# Altium PCB Cathode side.PcbDoc
Units mm, origin at the board's own origin, x right, y up, seen from the top; angles counter-clockwise.
Board outline 181.64 x 80 mm, 2 copper layers (Top Layer, Bottom Layer); 6 components, 18 nets, 105 pads, 0 vias.
Unrouted connection lines stored in the file: 40.
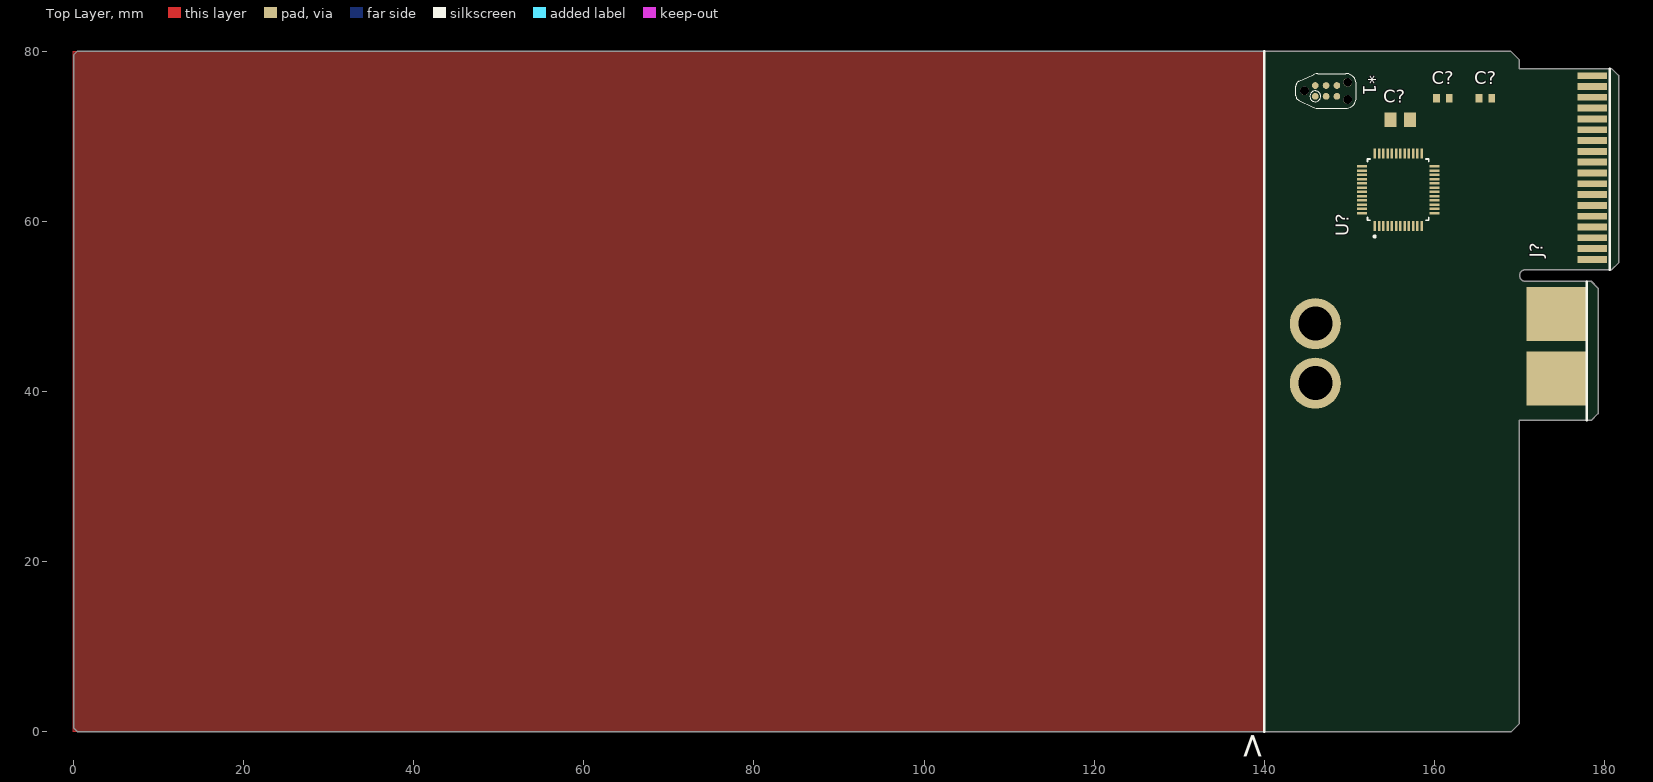
[diagram p0: Top Layer view]
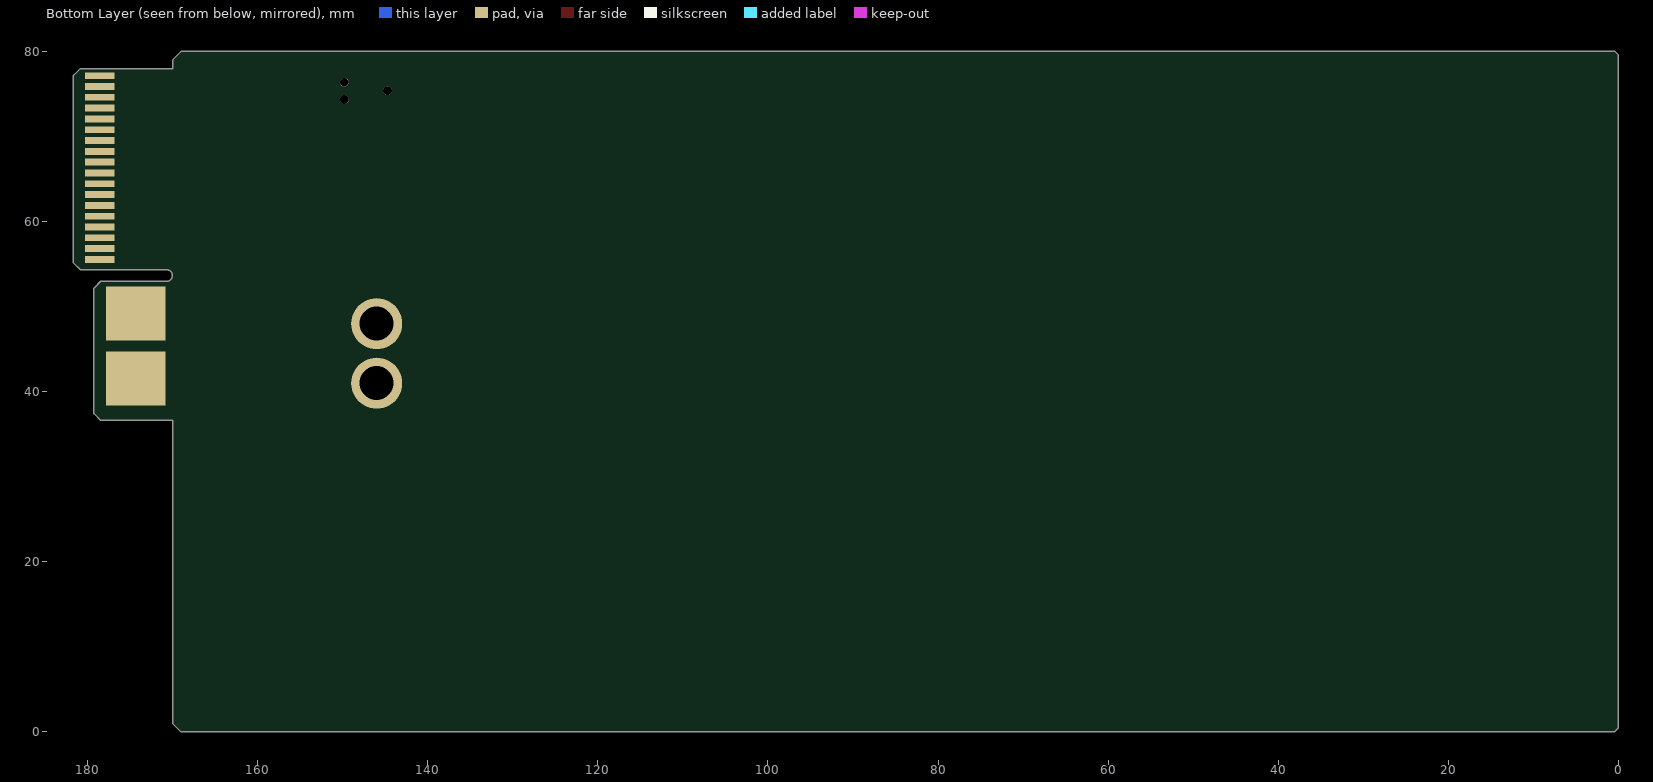
[diagram p1: Bottom Layer view, seen from below]

## Layer stack, top to bottom
Top Solder: solder mask 0.0102, Solder Resist, Dk 3.5
Top Layer: signal copper 0.0356
Dielectric 1: dielectric 0.32, FR-4, Dk 4.8
Bottom Layer: signal copper 0.0356
Bottom Solder: solder mask 0.0102, Solder Resist, Dk 3.5

## Board outline
0.006,0.494 0.5,0 169,0 170,1 170,36.62 178.44,36.62 179.25,37.43 179.25,52.17 178.44,52.98 170.7,52.98 cw(c170.7,53.66) 170.7,54.34 180.84,54.34 181.65,55.15 181.65,77.19 180.84,78 170,78 170,79 169,80 0.413,80 0.006,79.594

## Design rules (kind name [scope] priority, off if disabled: settings)
Clearance [All] p1: gap=0.254 ignorepadtopadclearanceinfootprint=FALSE
DiffPairsRouting [All] p1: maxlimit=0.254 minlimit=0.254 mostfreqgap=0.254 toplayer_minwidth=0.381 toplayer_maxwidth=0.381 toplayer_prefwidth=0.381 bottomlayer_minwidth=0.381 bottomlayer_maxwidth=0.381 bottomlayer_prefwidth=0.381 maxuncoupledlength=12.7
PolygonConnect [All] p1: connectstyle=Relief reliefconductorwidth=0.254 reliefentries=4 polygonreliefangle="90 Angle" airgapwidth=0.254
RoutingVias [All] p1: holewidth=0.711 width=1.27 viastyle="Through Hole" minholewidth=0.711 minwidth=1.27 maxholewidth=0.711 maxwidth=1.27
SolderMaskExpansion [All] p1: expansion=0.102 istentingtop=FALSE
Width [All] p1: maxlimit=0.254 minlimit=0.254 preferedwidth=0.254
29 further rules are at their usual default settings.

## Classes and differential pairs
component class "power management": J?
component class mcu: *1 C? U?
differential pair C_SENSE: +C_SENSE_P -C_SENSE_N

## Components (designator, comment, footprint, x,y, rotation, side; value= is the part's Value field where it differs from the comment)
*1 "TC2030" TC2030-IDC-NL 147.27,75.365 r0 top
C? "100N" CAP_0603 166,74.5 r0 top
C? "4U7" CAP_0805 156,72 r0 top
C? "100N" CAP_0603 161,74.5 r0 top
J? "2204061-2 CARD EDGE" "2204061-2 CARD EDGE-Footprint-1" 170,36.62 r90 top locked
U? "STM32G070CBT6" FP-LQFP48-5B-MFG 155.75,63.75 r90 top

## Footprints (in the part's own frame and the unit in brackets; to place one, negate y for a bottom-side part, rotate by r counter-clockwise, add the part's x,y. Pads: shape width x height; smd on the part's side, far side on the other; paste and mask are expansions set on the pad)
"2204061-2 CARD EDGE-Footprint-1" [mm]
  rect 6.35x7 smd far side: 1(4.925,-4.325) 2(12.55,-4.34)
  rect 6.35x7 smd: 3(4.925,-4.325) 4(12.545,-4.325)
  rect 0.8x3.5 smd: 5(18.94,-8.575) 6(20.21,-8.575) 7(21.48,-8.575) 8(22.75,-8.575) 9(24.02,-8.575) 10(25.29,-8.575) 11(26.56,-8.575) 12(27.83,-8.575) 13(29.1,-8.575) 14(30.37,-8.575) 15(31.64,-8.575) 16(32.91,-8.575) 17(34.18,-8.575) 18(35.45,-8.575) 19(36.72,-8.575) 20(37.99,-8.575) 21(39.26,-8.575) 22(40.53,-8.575)
  rect 0.8x3.5 smd far side: 5(18.94,-8.575) 6(20.21,-8.575) 7(21.48,-8.575) 8(22.75,-8.575) 9(24.02,-8.575) 10(25.29,-8.575) 11(26.56,-8.575) 12(27.83,-8.575) 13(29.1,-8.575) 14(30.37,-8.575) 15(31.64,-8.575) 16(32.91,-8.575) 17(34.18,-8.575) 18(35.45,-8.575) 19(36.72,-8.575) 20(37.99,-8.575) 21(39.26,-8.575) 22(40.53,-8.575)
  silkscreen extent 0,-10.6 41.35,-7.92
CAP_0603 [mm]
  rect 0.8x1 smd: 1(-0.75,0) 2(0.75,0)
  body extent -0.8,-0.4 0.8,0.4, height 0.51
CAP_0805 [mm]
  rect 1.4x1.7 smd: 1(-1.143,0) 2(1.143,0)
  body extent -1.15,-0.76 1.15,0.79, height 1.01
FP-LQFP48-5B-MFG [mm]
  rect 1.2x0.3 smd paste+0 mask+0: 1(-4.25,2.75) 2(-4.25,2.25) 3(-4.25,1.75) 4(-4.25,1.25) 5(-4.25,0.75) 6(-4.25,0.25) 7(-4.25,-0.25) 8(-4.25,-0.75) 9(-4.25,-1.25) 10(-4.25,-1.75) 11(-4.25,-2.25) 12(-4.25,-2.75) 25(4.25,-2.75) 26(4.25,-2.25) 27(4.25,-1.75) 28(4.25,-1.25) 29(4.25,-0.75) 30(4.25,-0.25) 31(4.25,0.25) 32(4.25,0.75) 33(4.25,1.25) 34(4.25,1.75) 35(4.25,2.25) 36(4.25,2.75)
  rect 0.3x1.2 smd paste+0 mask+0: 13(-2.75,-4.25) 14(-2.25,-4.25) 15(-1.75,-4.25) 16(-1.25,-4.25) 17(-0.75,-4.25) 18(-0.25,-4.25) 19(0.25,-4.25) 20(0.75,-4.25) 21(1.25,-4.25) 22(1.75,-4.25) 23(2.25,-4.25) 24(2.75,-4.25) 37(2.75,4.25) 38(2.25,4.25) 39(1.75,4.25) 40(1.25,4.25) 41(0.75,4.25) 42(0.25,4.25) 43(-0.25,4.25) 44(-0.75,4.25) 45(-1.25,4.25) 46(-1.75,4.25) 47(-2.25,4.25) 48(-2.75,4.25)
  silkscreen extent -5.62,-3.6 3.6,3.6, body extent -4.95,-4.95 4.95,4.95, height 0.25
TC2030-IDC-NL [mil]
  round 31 smd paste-39.37: 1(-50,-25) 2(-50,25) 3(0,-25) 4(0,25) 5(50,-25) 6(50,25)
  round 40 hole 40 unplated: ""(-100,0) ""(100,-40) ""(100,40)
  silkscreen extent -140,-81 140,80

## Part data
*1: library part CMP-002-00072-1, "Adapter Cable For Cortex"
C? C?: library part CAP_0603_16V, "Capacitor SMD 0603 16V"
C?: library part CAP_0805_16V, "Capacitor SMD 0805 16V"
J?: library part CMP-002-00073-1
U?: library part CMP-12105-000112-1, "IC MCU 32BIT 128KB FLASH 48LQFP", RoHS Compliant=Yes

## Free pads (board coordinates)
  round 6 hole 4: 2(146,41) 3(146,48)

## Nets (pads, with @x,y where several pads share a name; then routed paths per layer and width w, separated by ;. In a path a pad name is that pad's centre, name@x,y a point inside that pad or via, vN(x,y) a via of type N, cw(c..) or ccw(c..) an arc to the next point about the centre after c; other vN are vias at no path point)
3V3: *1.1 C?.2@157.143,72 C?.2@161.75,74.5 J?.10 J?.11 U?.6
5V: J?.7 J?.8
C_SENSE_N: J?.15
C_SENSE_P: J?.14
CELL_ANODE: J?.1 J?.2
CELL_CATHODE: J?.3 J?.4 | length 0.2
  Top Layer w0.254: J?.4@174.16,49 J?.4
DATA: 
GND: *1.5 C?.1 J?.5 J?.6 J?.9 J?.12 J?.13 J?.16 J?.19 J?.22
GPIO_1: J?.17
GPIO_2: J?.18
GPIO_3: J?.20
GPIO_4: J?.21
GPIO_5: 
NetC?_2: C?.2@166.75,74.5 U?.5
RST: *1.3 U?.10
SYS_JTCK-SWCLK: *1.4
SYS_JTDO-SWO: *1.6
SYS_JTMS-SWDIO: *1.2
pads on no net: *1. U?.1 U?.2 U?.3 U?.4 U?.7 U?.8 U?.9 U?.11 U?.12 U?.13 U?.14 U?.15 U?.16 U?.17 U?.18 U?.19 U?.20 U?.21 U?.22 U?.23 U?.24 U?.25 U?.26 U?.27 U?.28 U?.29 U?.30 U?.31 U?.32 U?.33 U?.34 U?.35 U?.36 U?.37 U?.38 U?.39 U?.40 U?.41 U?.42 U?.43 U?.44 U?.45 U?.46 U?.47 U?.48

## Polygon pours and split planes (outlines as drawn)
3V3 on Top Layer "NONET_L-01_P-001" (solid, pour order 0): 140,80 0,80 0,0 140,0
no net on Top Layer "NONET_L-01_P-001" (solid, pour order 1): 140,80 140,0 0,0 0,80

## Silkscreen, mask and mechanical layers (free items; w line width, h text height)
Top Overlay:
  lines w0.3: 140,0 140,80
  text "<---mosture sensor" at 140.948,0 h5 r90
Mechanical 1:
  lines w0.013: 0.006,0.006 150.006,0.006
  lines w0.254: 170.7,52.98 cw(c170.7,53.66) 170.7,54.34
  lines w0.3: 0,0.5 0.5,0 ; 170.7,52.98 178.44,52.98 179.25,52.17 179.25,37.43 178.44,36.62 170,36.62 ; 170.7,54.34 180.84,54.34 181.65,55.15 181.65,77.19 180.84,78 170,78 ; 0.5,0 0.006,0.494 0.006,79.594 0.413,80 169,80 ; 0.5,0 169,0 ; 0.5,0 169,0 ; 169,0 170,1 ; 169,0 170,1 ; 169,80 170,79 ; 169,80 170,79 ; 170,1 170,36.62 ; 170,1 170,36.62 ; 170,78 170,79 ; 170,78 170,79